# Altium PCB Sampler_4HP.PCBDOC (part 2 of 6)
Units mm, origin at the board's own origin, x right, y up, seen from the top; angles counter-clockwise.
Board outline 159.99 x 100 mm, 4 copper layers (Top, GP1(GND), L3, Bot), stack 1.648 mm thick; 546 components, 321 nets, 1657 pads, 795 vias.
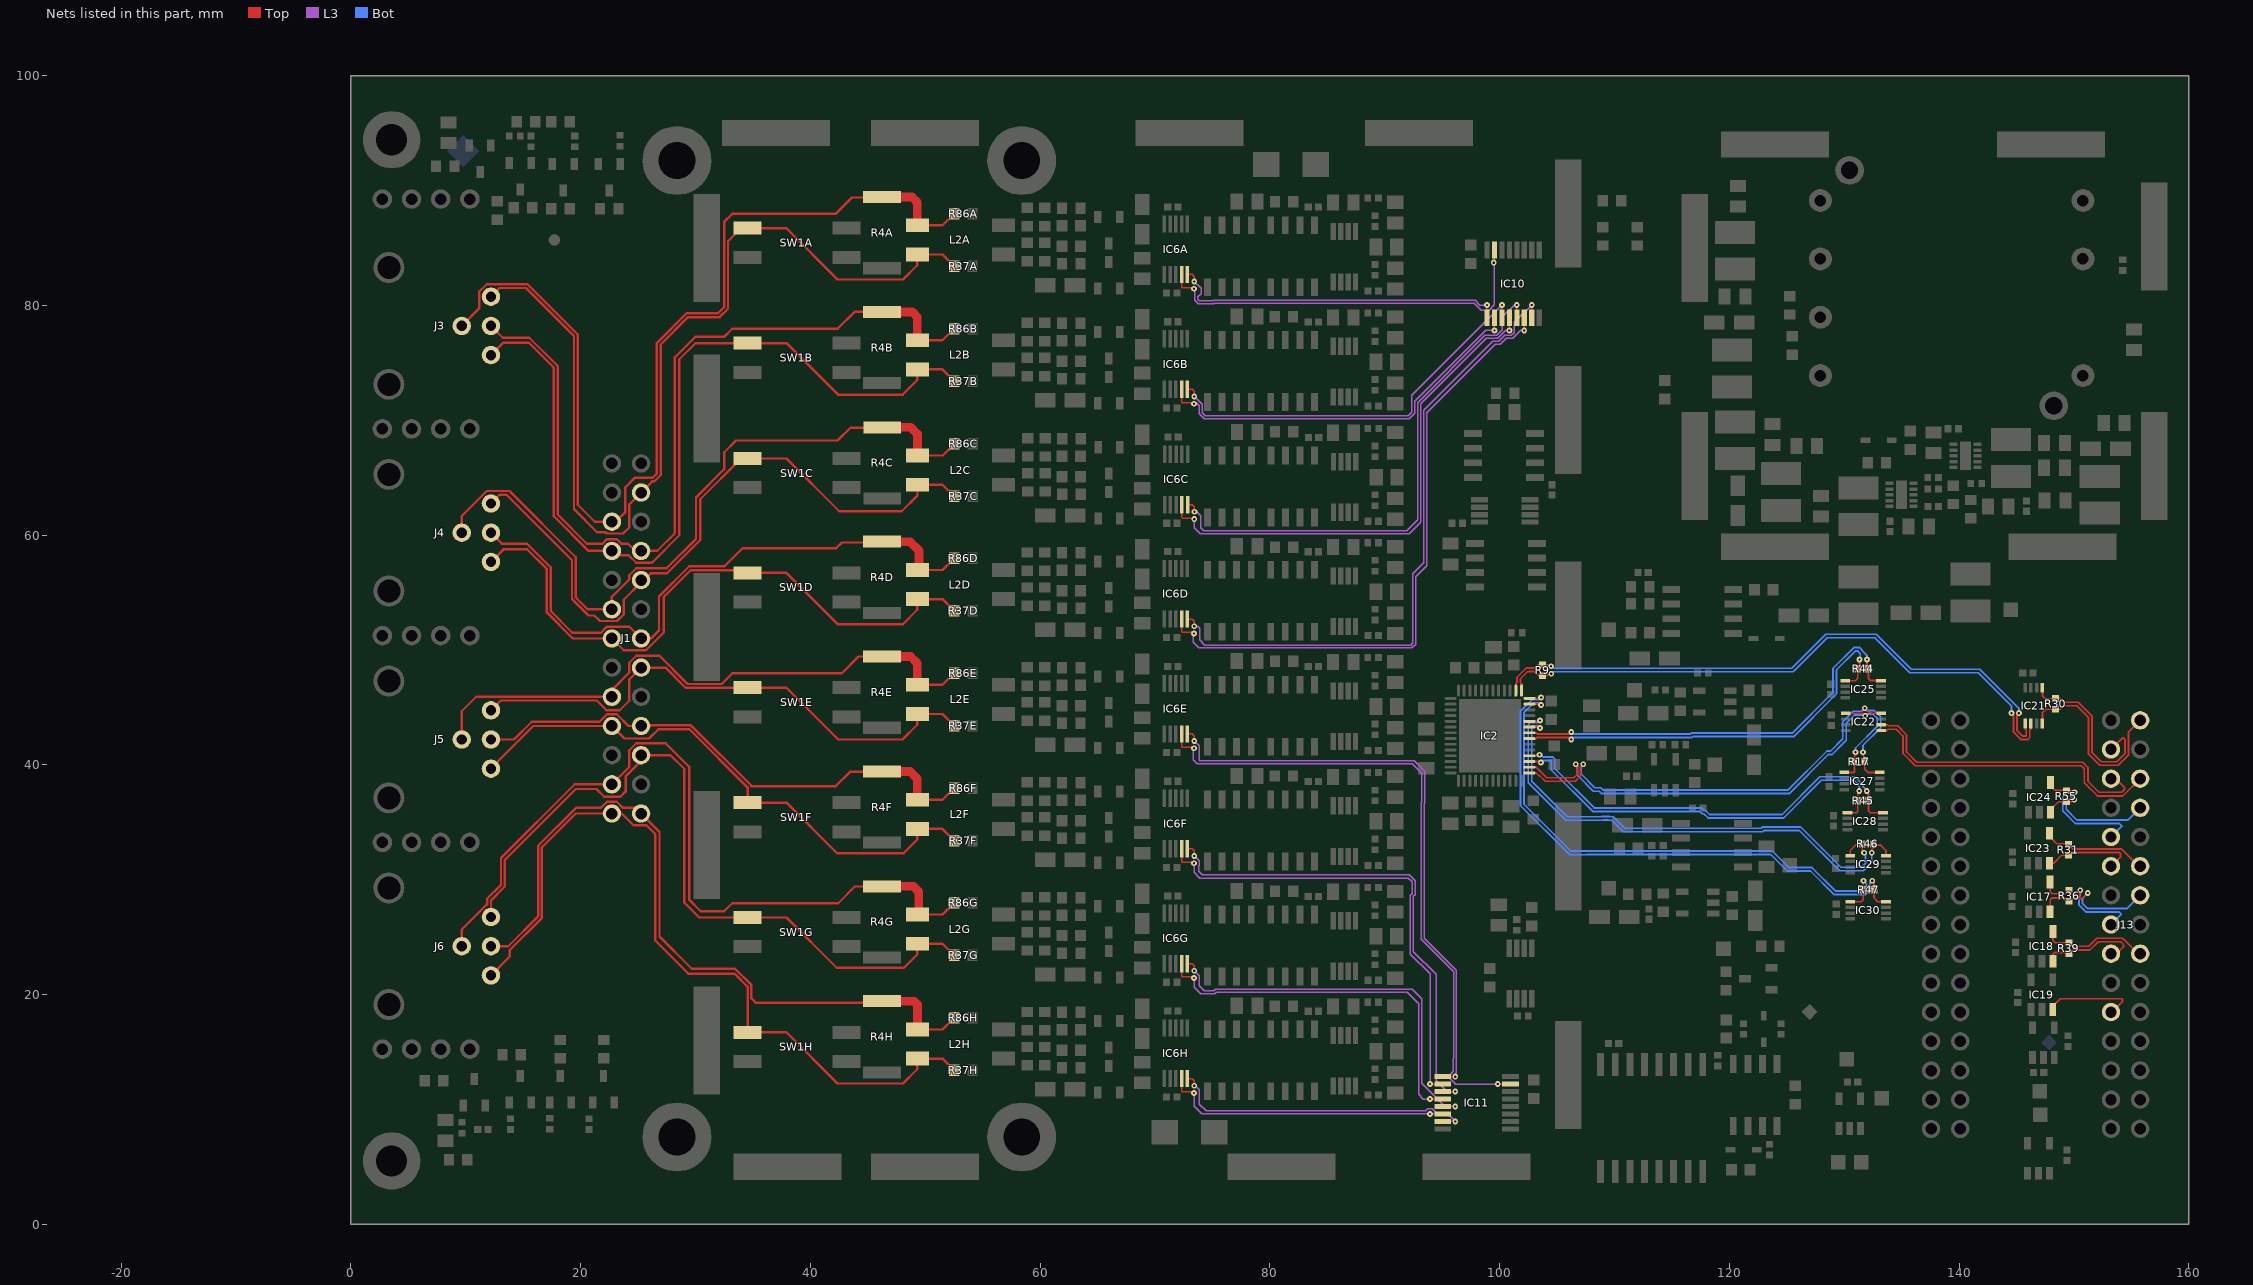
[diagram p4: the nets of this part, all layers, seen from the top]

## Footprints (in the part's own frame and the unit in brackets; to place one, negate y for a bottom-side part, rotate by r counter-clockwise, add the part's x,y. Pads: shape width x height; smd on the part's side, far side on the other; paste and mask are expansions set on the pad) (continued)
IND_MURATA-PS_8400 [mm] "Miniature Surface Mount Power Inductors, 4.5mm L X 3.3mm W X 2.9mm H, MURATA 8400 Series"
  rect 2x3.5 smd: 1(-1.6,0) 2(1.6,0)
  silkscreen extent -0.3,-1.8 0.3,1.8, body extent -2.4,-1.8 2.4,1.8, height 2.9
IND_WURTH_WE-SL2 [mm] "Common Mode SMD Line Filter WE-SL2"
  rect 2x1.2 smd: 1(-3.75,1.27) 2(-3.75,-1.27) 3(3.75,-1.27) 4(3.75,1.27)
  silkscreen extent -4.75,-3.15 4.75,3.15, body extent -4.75,-3.15 4.75,3.15, height 5.3
LED_DIALIGHT_571-0122F [mm] "2x 2mm LED (Top: Green, Bot: Green) PCB Edge Mounting (Without positioning pins) DIALIGHT 571 Serie"
  round 1.7 hole 1: 1(0,0) 2(2.54,0) 3(5.08,0) 4(7.62,0)
  silkscreen extent -6.55,-1.24 8.89,1.24, body extent -6.55,-1.24 8.89,1.24, height 8.61
MTG270_500 [mm] "Plated Through Hole: Hole Dia.=2.7mm Pad Dia.=5.0mm"
  round 5 hole 2.7: 1(0,0)
QFN50P700X800X80_HS-53M [mm] "QFN, 52-Leads, Body 7.00x8.00mm, Pitch 0.50mm, Thermal Pad 5.41x6.40mm, IPC Low Density"
  oval 1.05x0.25 smd: 1(-3.425,3.25) 2(-3.425,2.75) 3(-3.425,2.25) 4(-3.425,1.75) 5(-3.425,1.25) 6(-3.425,0.75) 7(-3.425,0.25) 8(-3.425,-0.25) 9(-3.425,-0.75) 10(-3.425,-1.25) 11(-3.425,-1.75) 12(-3.425,-2.25) 13(-3.425,-2.75) 14(-3.425,-3.25) 27(3.425,-3.25) 28(3.425,-2.75) 29(3.425,-2.25) 30(3.425,-1.75) 31(3.425,-1.25) 32(3.425,-0.75) 33(3.425,-0.25) 34(3.425,0.25) 35(3.425,0.75) 36(3.425,1.25) 37(3.425,1.75) 38(3.425,2.25) 39(3.425,2.75) 40(3.425,3.25)
  oval 0.25x1.05 smd: 15(-2.75,-3.925) 16(-2.25,-3.925) 17(-1.75,-3.925) 18(-1.25,-3.925) 19(-0.75,-3.925) 20(-0.25,-3.925) 21(0.25,-3.925) 22(0.75,-3.925) 23(1.25,-3.925) 24(1.75,-3.925) 25(2.25,-3.925) 26(2.75,-3.925) 41(2.75,3.925) 42(2.25,3.925) 43(1.75,3.925) 44(1.25,3.925) 45(0.75,3.925) 46(0.25,3.925) 47(-0.25,3.925) 48(-0.75,3.925) 49(-1.25,3.925) 50(-1.75,3.925) 51(-2.25,3.925) 52(-2.75,3.925)
  rect 5.41x6.4 smd: 53(0,0)
  silkscreen extent -4.47,-4.2 3.7,4.2, body extent -3.55,-4.05 3.55,4.05, height 0.8
RENHOTEC_RHT-610-0049 [mm] "Dual Right Angle 50 Ohm BNC Jack, White Valox Case"
  round 1.6 hole 0.9: 1(-6.2,-2.54) 2(-6.2,0) 3(-6.2,2.54) 4(-3.66,0)
  round 2.7 hole 2: 6(2.69,-5.08) 7(2.69,5.08)
  silkscreen extent -9.85,-7.5 29.25,7.5, body extent -9.85,-7.5 29.25,7.5, height 29.3
RESC1005X40N [mm] "Chip Resistor, EIA 0402, Metric 1005, Body 1.0x0.5mm, IPC Medium Density"
  rect 0.58x0.62 smd: 1(-0.47,0) 2(0.47,0)
  body extent -0.52,-0.27 0.53,0.28, height 0.4
RESC1608X55N [mm] "Chip Resistor, EIA 0603, Metric 1608, Body 1.6x0.8mm, IPC Medium Density"
  rect 0.9x1 smd: 1(-0.8,0) 2(0.8,0)
  body extent -0.87,-0.47 0.88,0.48, height 0.55
RESC6331X70N [mm] "Chip Resistor, EIA 2512, Metric 6331, 2-Leads, Body 6.3x3.1mm, IPC Medium Density"
  rect 1.05x3.3 smd: 1(-3.1,0) 2(3.1,0)
  silkscreen extent -2.2,-1.65 2.2,1.65, body extent -3.25,-1.65 3.25,1.65, height 0.7
SODFL2512X100N [mm] "SODFL Diode; 1.70mm W X 1.25mm L X 1.00mm H body, IPC Medium Density"
  rect 0.84x0.46 smd: 1(-1.14,0) 2(1.14,0)
  silkscreen extent -1.47,-0.65 0.85,0.86, body extent -1.35,-0.65 1.35,0.65, height 1
SOIC127P600X175-8N [mm] "SOIC 8, Pitch 1.27mm - Body 4x5mm, IPC Medium Density"
  rect 1.55x0.6 smd: 1(-2.7,1.905) 2(-2.7,0.635) 3(-2.7,-0.635) 4(-2.7,-1.905) 5(2.7,-1.905) 6(2.7,-0.635) 7(2.7,0.635) 8(2.7,1.905)
  silkscreen extent -2.52,-2.5 1.55,2.88, body extent -3.1,-2.5 3.1,2.5, height 1.75
SOIC127P1030X265-16N [mm] "SOIC 16, Pitch 1.27mm - Body 7.5x10.3mm, IPC Medium Density"
  rect 2x0.6 smd: 1(-4.65,4.445) 2(-4.65,3.175) 3(-4.65,1.905) 4(-4.65,0.635) 5(-4.65,-0.635) 6(-4.65,-1.905) 7(-4.65,-3.175) 8(-4.65,-4.445) 9(4.65,-4.445) 10(4.65,-3.175) 11(4.65,-1.905) 12(4.65,-0.635) 13(4.65,0.635) 14(4.65,1.905) 15(4.65,3.175) 16(4.65,4.445)
  silkscreen extent -5.52,-5.15 3.33,5.37, body extent -5.18,-5.25 5.18,5.25, height 1.68
SON50P200X300X80-11N-R94X250 [mm] "SON, 10-Leads, Body 2x3mm, Pitch 0.5mm, Thermal Pad 0.94x2.5mm, IPC Medium Density"
  rect 0.7x0.3 smd: 1(-1.05,1) 2(-1.05,0.5) 3(-1.05,0) 4(-1.05,-0.5) 5(-1.05,-1) 6(1.05,-1) 7(1.05,-0.5) 8(1.05,0) 9(1.05,0.5) 10(1.05,1)
  rect 0.94x2.5 smd: 11(0,0)
  silkscreen extent -1.5,-1.55 1.05,1.6, body extent -1.05,-1.55 1.05,1.55, height 0.8
SOP50P310X90-8N [mm] "SOP, 0.50mm pitch; 8 pin, 2.30mm W X 2.00mm L X 0.90mm H body, PC Medium Density"
  rect 0.85x0.3 smd: 1(-1.55,0.75) 2(-1.55,0.25) 3(-1.55,-0.25) 4(-1.55,-0.75) 5(1.55,-0.75) 6(1.55,-0.25) 7(1.55,0.25) 8(1.55,0.75)
  silkscreen extent -1.82,-1 0.8,1.53, body extent -1.62,-1 1.62,1, height 0.9
SOP50P490X110-10N [mm] "MSOP, 10-Leads, Body 3.1x3.1mm (max), Pitch 0.50mm, IPC Medium Density"
  rect 1.5x0.3 smd: 1(-2.2,1) 2(-2.2,0.5) 3(-2.2,0) 4(-2.2,-0.5) 5(-2.2,-1) 6(2.2,-1) 7(2.2,-0.5) 8(2.2,0) 9(2.2,0.5) 10(2.2,1)
  silkscreen extent -2.82,-1.5 1.13,1.77, body extent -2.45,-1.55 2.45,1.55, height 1.1
SOP65P490X110-8N [mm] "SOP, 0.65mm pitch; 8 pin, 3.00mm W X 3.00mm L X 1.10mm H body, IPC Medium Density"
  rect 1.5x0.45 smd: 1(-2.2,0.975) 2(-2.2,0.325) 3(-2.2,-0.325) 4(-2.2,-0.975) 5(2.2,-0.975) 6(2.2,-0.325) 7(2.2,0.325) 8(2.2,0.975)
  silkscreen extent -2.82,-1.5 1.12,1.82, body extent -2.45,-1.55 2.45,1.55, height 1.1
SOP65P640X120-16N [mm] "SOP, 0.65mm pitch; 16 pin, 4.40mm W X 5.00mm L X 1.20mm H body IPC Medium Density"
  rect 1.45x0.45 smd: 1(-2.95,2.275) 2(-2.95,1.625) 3(-2.95,0.975) 4(-2.95,0.325) 5(-2.95,-0.325) 6(-2.95,-0.975) 7(-2.95,-1.625) 8(-2.95,-2.275) 9(2.95,-2.275) 10(2.95,-1.625) 11(2.95,-0.975) 12(2.95,-0.325) 13(2.95,0.325) 14(2.95,0.975) 15(2.95,1.625) 16(2.95,2.275)
  silkscreen extent -3.07,-2.55 1.85,3.17, body extent -3.12,-2.55 3.12,2.55, height 1.2
SOT95P240X110-3N [mm] "SOT23 3-Leads, Pitch 0.95mm, Body 1.3x2.9mm, IPC Medium Density"
  rect 1.05x0.65 smd: 1(-1.15,0.95) 2(-1.15,-0.95) 3(1.15,0)
  silkscreen extent -1.52,-1.45 0.3,1.92, body extent -1.25,-1.5 1.25,1.5, height 1.1
SOT95P280X100-5N [mm] "SOT23, 0.95mm pitch; 5 pin, 1.625mm W X 2.9mm L, IPC Medium Density"
  rect 1.1x0.55 smd: 1(-1.35,0.95) 2(-1.35,0) 3(-1.35,-0.95) 4(1.35,-0.95) 5(1.35,0.95)
  silkscreen extent -1.78,-1.45 0.48,1.87, body extent -1.4,-1.5 1.4,1.5, height 1
SOT95P280X145-5N [mm] "SOT, 0.95mm pitch; 5 pin, 1.60mm W X 2.90mm L X 1.45mm H body, IPC Medium Density"
  rect 1.1x0.6 smd: 1(-1.3,0.95) 2(-1.3,0) 3(-1.3,-0.95) 4(1.3,-0.95) 5(1.3,0.95)
  silkscreen extent -1.72,-1.45 0.43,1.87, body extent -1.4,-1.5 1.4,1.5, height 1.45
SW_CTS_204-121ST [mm] "Body 7.26 x 9.78mm SPST DIP Switch, 204 Series"
  rect 1.13x2.44 smd: 1(-1.27,-4.3) 2(1.27,-4.3) 3(1.27,4.3) 4(-1.27,4.3)
  silkscreen extent -3.63,-4.89 3.63,4.89, body extent -3.63,-5.2 3.63,5.2, height 10.36
TPS127 [mm] "1.27 x  1.27mm SMD Test Point Area"
  rect 1.27x1.27 smd paste-1.27: 1(0,0)
  silkscreen extent -0.94,-0.94 0.94,0.94

## Part data
B1 B2: library part PLATED_HOLE2.7_PAD5.0, "Single Terminal Socket", Author="CERN DEM JMW", ComponentHeight=0mm, Component Type="Standard (No BOM)", CreateDate=27.09.2011, Family="Plated Hole", HelpURL=Undefined, LatestRevisionDate=27.09.2011, Mounted=No, PackageDescription="Plated Through Hole: Hole Dia.=2.7mm Pad Dia.=5.0mm", Part Description="Plated Through Hole: Hole Dia.=2.7mm Pad Dia.=5.0mm", Part Number=PLATED_HOLE2.7_PAD5.0, Pin Count=1, Sense=No, SMD=No, Socket=No, Status=None
C1 C29 C44 C66 C68 C69 C112 C117: library part CC0603_1UF_25V_10%_X7R, "Non-polarised capacitor", Case=0603, Manufacturer=GENERIC, Manufacturer1 ComponentHeight=0.9mm, Manufacturer1 Example=MURATA, Manufacturer1 Part Number=GRM188R71E105KA12D, Tolerance=±10%, Voltage=25V, Author="CERN DEM JLC", Component Type=Standard, CreateDate=18.01.2011, HelpURL=\\cern.ch\dfs\Applications\Altium\Datasheets\CC0603_X7R_MURATA.pdf, LatestRevisionDate=18.01.2011, Manufacturer Part Number=CC0603_1UF_25V_10%_X7R, Mounted=Yes, Part Description="SMD Multilayer Chip Ceramic Capacitor", Part Number=CC0603_1UF_25V_10%_X7R, Pin Count=2, Sense=No, SMD=Yes, Socket=No, Status=None, TC=X7R
C2: library part CC0603_2.2UF_16V_10%_X5R, "Non-polarised capacitor", Case=0603, Manufacturer=GENERIC, Manufacturer1 ComponentHeight=0.9mm, Manufacturer1 Example=YAGEO, Manufacturer1 Part Number=CC0603KRX5R7BB225, Tolerance=±10%, Voltage=16V, Author="CERN DEM JLC", Component Type=Standard, CreateDate=28.04.2011, HelpURL=\\cern.ch\dfs\Applications\Altium\Datasheets\CC0805_X5R_PHYCOMP_HC.pdf, LatestRevisionDate=28.04.2011, Manufacturer Part Number=CC0603_2.2UF_16V_10%_X5R, Mounted=Yes, Part Description="SMD Multilayer Chip Ceramic Capacitor", Part Number=CC0603_2.2UF_16V_10%_X5R, Pin Count=2, Sense=No, SMD=Yes, Socket=No, Status=Preferred, TC=X5R
C3 C4 C5 C7 C8 C54 C57 C94: library part CC0603_100NF_50V_10%_X7R, "Non-polarised capacitor", Case=0603, Manufacturer=GENERIC, Manufacturer1 ComponentHeight=0.87mm, Manufacturer1 Example=PHYCOMP, Manufacturer1 Part Number=223858615649, Tolerance=±10%, Voltage=50V, Author="CERN DEM JLC", Component Type=Standard, CreateDate=03.12.2007, HelpURL=\\cern.ch\dfs\Applications\Altium\Datasheets\CC0603_X7R_PHYCOMP.pdf, LatestRevisionDate=03.12.2007, Manufacturer Part Number=CC0603_100NF_50V_10%_X7R, Mounted=Yes, Part Description="SMD Multilayer Chip Ceramic Capacitor", Part Number=CC0603_100NF_50V_10%_X7R, Pin Count=2, Sense=No, SMD=Yes, Socket=No, Status=Preferred, TC=X7R
C6 C9 C12 C13 C14 C15 C16: library part CC0805_10UF_25V_10%_X5R, "Non-polarised capacitor", Case=0805, Manufacturer=GENERIC, Manufacturer1 ComponentHeight=0.95mm, Manufacturer1 Example=MURATA, Manufacturer1 Part Number=GRM219R61E106KA12D, Tolerance=±10%, Voltage=25V, Author="CERN DEM JLC", Component Type=Standard, CreateDate=25.10.2012, HelpURL=\\cern.ch\dfs\Applications\Altium\Datasheets\CC0805_X5R_MURATA_GRM.pdf, LatestRevisionDate=06.09.2016, Manufacturer Part Number=CC0805_10UF_25V_10%_X5R, Mounted=Yes, Part Description="SMD Multilayer Chip Ceramic Capacitor", Part Number=CC0805_10UF_25V_10%_X5R, Pin Count=2, Sense=No, SMD=Yes, Socket=No, Status=Preferred, TC=X5R
C10A C10B C10C C10D C10E C10F C10G C10H C11A C11B C11C C11D C11E C11F C11G C11H C18 C19 C28 C49 C50 C51 C52 C56 C60 C77 C115 C118: library part CTE3216-18_10UF_16V_20%_AVX_TCJ, "Polarised capacitor", Case=A, Manufacturer=AVX, Manufacturer Part Number=TCJA106M016R0200, Tolerance=±20%, Voltage=16V, Author="CERN DEM JLC", ComponentHeight=1.8mm, Component Type=Standard, CreateDate=29.03.2012, HelpURL=\\cern.ch\dfs\Applications\Altium\Datasheets\CTE_AVX_TCJ.pdf, LatestRevisionDate=29.03.2012, Mounted=Yes, Part Description="ESR 0R200 Tantalum Solid Electrolytic Chip Capacitor with Conductive Polymer Electrode", Part Number=CTE3216-18_10UF_16V_20%_AVX_TCJ, Pin Count=2, Sense=No, SMD=Yes, Socket=No, Status=Preferred
C17A C17B C17C C17D C17E C17F C17G C17H C23A C23B C23C C23D C23E C23F C23G C23H C25A C25B C25C C25D C25E C25F C25G C25H: library part CC0805_2.2NF_25V_1%_C0G, "Non-polarised capacitor", Case=0805, Manufacturer=GENERIC, Manufacturer1 ComponentHeight=0.88mm, Manufacturer1 Example=KEMET, Manufacturer1 Part Number=C0805C222F3GACTU, Tolerance=±1%, Voltage=25V, Author="CERN DEM JLC", Component Type=Standard, CreateDate=11.03.2015, HelpURL="\\cern.ch\dfs\Applications\Altium\Datasheets\CC0805_C0G_KEMET_(Commercial Grade).pdf", LatestRevisionDate=11.03.2015, Manufacturer Part Number=CC0805_2.2NF_25V_1%_C0G, Mounted=Yes, Part Description="SMD Multilayer Chip Ceramic Capacitor", Part Number=CC0805_2.2NF_25V_1%_C0G, Pin Count=2, Sense=No, SMD=Yes, Socket=No, Status=None, TC=C0G/NP0
C20 C21 C22 C24 C30 C31 C33 C37 C38 C43 C45 C46 C55 C58 C62 C63 C67 C120 C122 C153 C154 C156 C157 C158 C159 C160 C161 C162: library part CC0402_100NF_16V_10%_X5R, "Non-polarised capacitor", Case=0402, Manufacturer=GENERIC, Manufacturer1 ComponentHeight=0.55mm, Manufacturer1 Example=MURATA, Manufacturer1 Part Number=GRM155R61C104KA88D, Tolerance=±10%, Voltage=16V, Author="CERN DEM JLC", Component Type=Standard, CreateDate=10.12.2013, HelpURL=\\cern.ch\dfs\Applications\Altium\Datasheets\CC0402_X5R_MURATA_GRM.pdf, LatestRevisionDate=10.12.2013, Manufacturer Part Number=CC0402_100NF_16V_10%_X5R, Mounted=Yes, Part Description="SMD Multilayer Chip Ceramic Capacitor", Part Number=CC0402_100NF_16V_10%_X5R, Pin Count=2, Sense=No, SMD=Yes, Socket=No, Status=None, TC=X5R
C26 C27 C32 C34 C36 C39 C40 C42 C48 C53 C59 C61 C64 C121 C123: library part CC0805_22UF_16V_10%_X5R, "Non-polarised capacitor", Case=0805, Manufacturer=GENERIC, Manufacturer1 ComponentHeight=1.35mm, Manufacturer1 Example=TDK, Manufacturer1 Part Number=C2012X5R1C226KT, Tolerance=±10%, Voltage=16V, Author="CERN DEM JLC", Component Type=Standard, CreateDate=25.10.2012, HelpURL=\\cern.ch\dfs\Applications\Altium\Datasheets\CC0805_X5R_TDK_C.pdf, LatestRevisionDate=25.10.2012, Manufacturer Part Number=CC0805_22UF_16V_10%_X5R, Mounted=Yes, Part Description="SMD Multilayer Chip Ceramic Capacitor", Part Number=CC0805_22UF_16V_10%_X5R, Pin Count=2, Sense=No, SMD=Yes, Socket=No, Status=Preferred, TC=X5R
C35A C35B C35C C35D C35E C35F C35G C35H C41A C41B C41C C41D C41E C41F C41G C41H C70A C70B C70C C70D C70E C70F C70G C70H C71A C71B C71C C71D C71E C71F C71G C71H: library part CC0402_100NF_16V_10%_X7R, "Non-polarised capacitor", Case=0402, Manufacturer=GENERIC, Manufacturer1 ComponentHeight=0.55mm, Manufacturer1 Example=MURATA, Manufacturer1 Part Number=GRM155R71C104KA88D, Tolerance=±10%, Voltage=16V, Author="CERN DEM JLC", Component Type=Standard, CreateDate=2013-12-05, HelpURL=\\cern.ch\dfs\Applications\Altium\Datasheets\CC0402_X7R_MURATA_GRM.pdf, LatestRevisionDate=2007-12-03, Manufacturer Part Number=CC0402_100NF_16V_10%_X7R, Mounted=Yes, Part Description="SMD Multilayer Chip Ceramic Capacitor", Part Number=CC0402_100NF_16V_10%_X7R, Pin Count=2, Sense=No, SMD=Yes, Socket=No, Status="Not Recommended", TC=X7R
C47 C65 C114 C116: library part CC0603_10NF_50V_10%_X7R, "Non-polarised capacitor", Case=0603, Manufacturer=GENERIC, Manufacturer1 ComponentHeight=0.87mm, Manufacturer1 Example=PHYCOMP, Manufacturer1 Part Number=223858615636, Tolerance=±10%, Voltage=50V, Author="CERN DEM JLC", Component Type=Standard, CreateDate=03.12.2007, HelpURL=\\cern.ch\dfs\Applications\Altium\Datasheets\CC0603_X7R_PHYCOMP.pdf, LatestRevisionDate=03.12.2007, Manufacturer Part Number=CC0603_10NF_50V_10%_X7R, Mounted=Yes, Part Description="SMD Multilayer Chip Ceramic Capacitor", Part Number=CC0603_10NF_50V_10%_X7R, Pin Count=2, Sense=No, SMD=Yes, Socket=No, Status=Preferred, TC=X7R
C72A C72B C72C C72D C72E C72F C72G C72H: library part CC0805_82PF_100V_1%_NP0_AVX_08051A820FAT2A, "Non-polarised capacitor", Case=0805, Manufacturer=AVX, Manufacturer Part Number=08051A820FAT2A, Tolerance=±1%, Voltage=100V, Author="CERN DEM WB", ComponentHeight=0.9mm, Component Type=Standard, CreateDate=26.07.2016, HelpURL=\\cern.ch\dfs\Applications\Altium\Datasheets\CC0805_C0G_AVX.pdf, LatestRevisionDate=26.07.2016, Mounted=Yes, Part Description="SMD Multilayer Chip Ceramic Capacitor", Part Number=CC0805_82PF_100V_1%_NP0_AVX_08051A820FAT2A, Pin Count=2, Sense=No, SMD=Yes, Socket=No, Status="Not Recommended", TC=NP0
C73A C73B C73C C73D C73E C73F C73G C73H C74A C74B C74C C74D C74E C74F C74G C74H C75 C76: library part CC0805_47NF_25V_5%_C0G, "Non-polarised capacitor", Case=0805, Manufacturer=GENERIC, Manufacturer1 ComponentHeight=1.4mm, Manufacturer1 Example=KEMET, Manufacturer1 Part Number=C0805C473J3GACTU, Tolerance=±5%, Voltage=25V, Author="CERN DEM JLC", Component Type=Standard, CreateDate=18.01.2011, HelpURL="\\cern.ch\dfs\Applications\Altium\Datasheets\CC0805_C0G_KEMET_(Commercial Grade).pdf", LatestRevisionDate=18.01.2011, Manufacturer Part Number=CC0805_47NF_25V_5%_C0G, Mounted=Yes, Part Description="SMD Multilayer Chip Ceramic Capacitor", Part Number=CC0805_47NF_25V_5%_C0G, Pin Count=2, Sense=No, SMD=Yes, Socket=No, Status=None, TC=C0G/NP0
C78 C79: library part CC0805_NO-VALUE, "Non-polarised capacitor", Case=0805, Manufacturer1 ComponentHeight=1.35mm, Author="CERN DEM JLC", Component Type=Standard, CreateDate=10.12.2008, HelpURL=Undefined, LatestRevisionDate=11.09.2013, Manufacturer=Undefined, Manufacturer Part Number=CC0805_NO-VALUE, Mounted=No, Part Description="Reserved Footprint For 0805(2012) Chip Ceramic Capacitor", Part Number=CC0805_NO-VALUE, Pin Count=2, Sense=No, SMD=Yes, Socket=No, Status=None
C85A C85B C85C C85D C85E C85F C85G C85H C88A C88B C88C C88D C88E C88F C88G C88H: library part CC0603_18PF_50V_5%_NP0, "Non-polarised capacitor", Case=0603, Manufacturer=GENERIC, Manufacturer1 ComponentHeight=0.87mm, Manufacturer1 Example=PHYCOMP, Manufacturer1 Part Number=223886715189, Tolerance=±5%, Voltage=50V, Author="CERN DEM JLC", Component Type=Standard, CreateDate=03.12.2007, HelpURL=\\cern.ch\dfs\Applications\Altium\Datasheets\CC0603_NP0_PHYCOMP.pdf, LatestRevisionDate=03.12.2007, Manufacturer Part Number=CC0603_18PF_50V_5%_NP0, Mounted=Yes, Part Description="SMD Multilayer Chip Ceramic Capacitor", Part Number=CC0603_18PF_50V_5%_NP0, Pin Count=2, Sense=No, SMD=Yes, Socket=No, Status=Preferred, TC=C0G/NP0
CLIP1 CLIP2 CLIP3 CLIP4 CLIP5 CLIP6 CLIP7 CLIP8 CLIP9 CLIP10 CLIP11 CLIP12 CLIP13 CLIP14 CLIP15 CLIP16 CLIP17 CLIP18 CLIP19 CLIP20 CLIP21 CLIP22 CLIP23 CLIP24 CLIP25 CLIP26: "Surface Mount Clip for PCB Screening Covers", Manufacturer=HARWIN, Author="CERN DEM JLC", ComponentHeight=3.5mm, Component Type=Standard, CreateDate=2013-06-25, HelpURL=\\cern.ch\dfs\Applications\Altium\Datasheets\CLIP_HOLLAND-SHIELDING_LC.pdf, LatestRevisionDate=2013-06-25, Manufacturer Part Number=S1411-46R, Mounted=Yes, PackageDescription="Surface Mount Clip for PCB Screening Covers, 1500 Serie", Part Description="Surface Mount Clip for PCB Screening Covers, 1500 Serie", Part Number=S1411-46R, Pin Count=1, PressFit=No, SMD=Yes, Socket=No, Status=None, Table="Metal Screening Box"
D1A D1B D1C D1D D1E D1F D1G D1H D3A D3B D3C D3D D3E D3F D3G D3H: "Serial Diode", Case=SOT23-3, Manufacturer="NXP SEMICONDUCTORS", Power=250mW, Voltage=75V, Author="CERN DEM JMW", Bonding=No, ComponentHeight=1.1mm, Component Type=Standard, CreateDate=2008-11-21, Device=BAV199, HelpURL=\\cern.ch\dfs\Applications\Altium\Datasheets\BAV199.pdf, LatestRevisionDate=2008-11-21, Manufacturer Part Number=BAV199, Mounted=Yes, PackageDescription="SOT23 3-Leads, Pitch 0.95mm - Body 1.4x3mm, IPC Medium Density", Part Description="Low-Leakage Double Diode", Part Number=BAV199, Pin Count=3, PressFit=No, Sense=No, SMD=Yes, Socket=No
D2 D4 D5 D6: "Diode", Case=SOD-323F, Manufacturer="FAIRCHILD SEMICONDUCTOR", Power=150mA, Voltage=75V, Author="CERN DEM JLC", Bonding=No, ComponentHeight=1mm, Component Type=Standard, CreateDate=12.05.2011, Device=1N4148WS, HelpURL=\\cern.ch\dfs\Applications\Altium\Datasheets\1N4148WS.pdf, LatestRevisionDate=12.05.2011, Manufacturer Part Number=1N4148WS, Mounted=Yes, PackageDescription="SODFL Diode; 1.70mm W X 1.25mm L X 1.00mm H body, IPC Medium Density", Part Description="Small Signal Diodes", Part Number=1N4148WS, Pin Count=2, PressFit=No, Sense=No, SMD=Yes, Socket=No
D8 D9: "Zener Diode", Case=DO-214AA, Manufacturer="FAIRCHILD SEMICONDUCTOR", Power=600W, Voltage=12V, Author="CERN DEM JLC", Bonding=No, ComponentHeight=2.65mm, Component Type=Standard, CreateDate=10.04.2013, Device=SMBJ12A, HelpURL=\\cern.ch\dfs\Applications\Altium\Datasheets\SMBJ.pdf, LatestRevisionDate=10.04.2013, Manufacturer Part Number=SMBJ12A, Mounted=Yes, PackageDescription="DO-214-AA/SMB Diode, Molded Body; 5.34mm L X 3.625mm W X 2.65mm H, IPC Medium Density", Part Description="Uni-Directional Transient Voltage Suppressor Diode", Part Number=SMBJ12A, Pin Count=2, PressFit=No, Sense=No, SMD=Yes, Socket=No
FTG17: library part FIDUCIAL_TARGET_C100-200, "Fiducial Target", Author="CERN DEM JLC", ComponentHeight=0mm, Component Type="Standard (No BOM)", CreateDate=09.02.2010, Family=Fiducial, HelpURL=Undefined, LatestRevisionDate=04.04.2012, Mounted=No, PackageDescription="Round Fiducial Target, Top Layer, 1.0mm, Top Solder 2.0mm, Keepout =2.0mm", Part Description="Round Fiducial Target, Top Layer, 1.0mm, Top Solder 2.0mm, Keepout =2.0mm", Part Number=FIDUCIAL_TARGET_C100-200, Pin Count=1, Sense=No, SMD=Yes, Socket=No, Status=None
FTG18 FTG20: library part FIDUCIAL_TARGET_S100-200, "Fiducial Target", Author="CERN DEM JLC", ComponentHeight=0mm, Component Type="Standard (No BOM)", CreateDate=09.02.2010, Family=Fiducial, HelpURL=Undefined, LatestRevisionDate=04.04.2012, Mounted=No, PackageDescription="Square Fiducial Target, Top Layer, 1.0mm, Top Solder 2.0mm, Keepout =2.0mm", Part Description="Square Fiducial Target, Top Layer, 1.0mm, Top Solder 2.0mm, Keepout =2.0mm", Part Number=FIDUCIAL_TARGET_S100-200, Pin Count=1, Sense=No, SMD=Yes, Socket=No, Status=None
FTG19: library part FIDUCIAL_TARGET_S200-400, "Fiducial Target", Author="CERN DEM JLC", ComponentHeight=0mm, Component Type="Standard (No BOM)", CreateDate=02.06.2008, Family=Fiducial, HelpURL=Undefined, LatestRevisionDate=04.04.2012, Mounted=No, PackageDescription="Square Fiducial Target, Top Layer, 2.0mm, Top Solder 4.0mm, Keepout =4.0mm", Part Description="Square Fiducial Target, Top Layer, 2.0mm, Top Solder 4.0mm, Keepout =4.0mm", Part Number=FIDUCIAL_TARGET_S200-400, Pin Count=1, Sense=No, SMD=Yes, Socket=No, Status=None
IC1: "0.25ppm Noise, Low Drift Precision Buffered Voltage Reference", Case=SSOP8, Manufacturer="LINEAR TECHNOLOGY", Author=GK, Bonding=No, ComponentHeight=1.1mm, Component Type=Standard, CreateDate=07.06.2012, Device=LTC6655BHMS8-4.096#PBF, HelpURL=\\cern.ch\dfs\Applications\Altium\Datasheets\LTC6655BHMS8-5#PBF.pdf, LatestRevisionDate=07.06.2012, Manufacturer Part Number=LTC6655BHMS8-4.096#PBF, Mounted=Yes, PackageDescription="SOP, 8-Leads, Body 3.1x3.1mm (max), Pitch 0.65mm, IPC Medium Density", Part Description="4.096V, 0.25ppm Noise, Low Drift Precision Buffered Voltage Reference", Part Number=LTC6655BHMS8-4.096#PBF, Pin Count=8, PressFit=No, Sense=No, SMD=Yes, Socket=No
IC2: "Octal, 16-Bit, 1.5Msps/Ch  Simultaneous Sampling ADC", Case=QFP48, Manufacturer="LINEAR TECHNOLOGY", Author=GK, Bonding=No, ComponentHeight=0.8, Component Type=Standard, CreateDate=10.01.2017, Device=LTC2320HUKG-16#PBF, HelpURL=\\cern.ch\dfs\Applications\Altium\Datasheets\LTC2335CLX-18#PBF.pdf, LatestRevisionDate=10.01.2017, Manufacturer Part Number=LTC2320HUKG-16#PBF, Mounted=Yes, PackageDescription="QFN, 52-Leads, Body 7.00x8.00mm, Pitch 0.50mm, Thermal Pad 5.41x6.40mm, IPC Low Density", Part Description="Octal, 16-Bit, 1.5Msps/Ch  Simultaneous Sampling ADC", Part Number=LTC2320HUKG-16#PBF, Pin Count=48, PressFit=No, Sense=No, SMD=Yes, Socket=No
IC3: "CONV DC/DC 6W DUAL 12V +-12V PCB", Manufacturer="TDK-Lambda Americas Inc.", Author=GK, Bonding=No, ComponentHeight=10.45mm, Component Type=Standard, CreateDate=17.12.2016, Device=CC6-1212DF-E, LatestRevisionDate=17.12.2016, Manufacturer Part Number=CC6-1212DF-E, Mounted=Yes, PackageDescription="CC6 Series, Body 0.900 x 0.831 x 0.335, Regulated", Part Description="CONV DC/DC 6W DUAL 12V +-12V PCB", Part Number=CC6-1212DF-E, Pin Count=7, PressFit=No, Sense=No, SMD=No, Socket=No
IC4 IC7: "100mA, Low Noise, LDO Micropower Adjustable Regulator in SOT-23", Case=SOT23, Manufacturer="LINEAR TECHNOLOGY", Author="CERN DEM MR", Bonding=No, ComponentHeight=1mm, Component Type=Standard, CreateDate=17.02.2016, Device=LT1761ES5-BYP#TRMPBF, HelpURL=\\cern.ch\dfs\Applications\Altium\Datasheets\LT1761ES5-SD#TRMPBF.pdf, LatestRevisionDate=17.02.2016, Manufacturer Part Number=LT1761ES5-BYP#TRMPBF, Mounted=Yes, PackageDescription="SOT23, 0.95mm pitch; 5 pin, 1.6mm W X 2.9mm L, IPC Medium Density", Part Description="1.22V to 20V, 100mA, Low Noise, LDO Adjustable Micropower Regulator", Part Number=LT1761ES5-BYP#TRMPBF, Pin Count=5, PressFit=No, Sense=No, SMD=Yes, Socket=No
IC5 IC12A IC12B IC12C IC12D IC12E IC12F IC12G IC12H: "36-V, Precision, Rail-to-Rail Input Output, Low Offset Voltage Op Amp 8-VSSOP", Case=MSOP8, Manufacturer="TEXAS INSTRUMENTS", Author=GK, Bonding=No, ComponentHeight=1.1mm, Component Type=Standard, CreateDate=20.04.2017, Device=OPA2197IDGKR, HelpURL=\\cern.ch\dfs\Applications\Altium\Datasheets\OPA2140AIDGK.pdf, LatestRevisionDate=20.04.2017, Manufacturer Part Number=OPA2197IDGKR, Mounted=Yes, PackageDescription="SOP, 0.65mm pitch; 8 pin, 3.00mm W X 3.00mm L X 1.10mm H body, IPC Medium Density", Part Description="High-Precision, Low-Noise, Rail-to-Rail Output,10-MHz Op Amp", Part Number=OPA2197IDGKR, Pin Count=8, PressFit=No, Sense=No, SMD=Yes, Socket=No
IC6A IC6B IC6C IC6D IC6E IC6F IC6G IC6H: "10MHz, 20V/us, G= 1, 10, 100, 1000 iCMOS Programmable Gain Instrumentation Amplifier", Case=MSOP10, Manufacturer="ANALOG DEVICES", Author="CERN DEM JLC", Bonding=No, ComponentHeight=1.1mm, Component Type=Standard, CreateDate=2013-10-02, Device=AD8253ARMZ, HelpURL=\\cern.ch\dfs\Applications\Altium\Datasheets\AD8253ARMZ.pdf, LatestRevisionDate=2013-10-02, Manufacturer Part Number=AD8253ARMZ, Mounted=Yes, PackageDescription="MSOP, 10-Leads, Body 3.1x3.1mm (max), Pitch 0.50mm, IPC Medium Density", Part Description="10MHz, 20V/us, G= 1, 10, 100, 1000 iCMOS Programmable Gain Instrumentation Amplifier", Part Number=AD8253ARMZ, Pin Count=8, PressFit=No, Sense=No, SMD=Yes, Socket=No
IC8 IC26: "4.75-28VDC to 1-6VDC, 500mA Step-Down Converter With Sleep Mode", Case=SON10, Manufacturer="TEXAS INSTRUMENTS", Author="CERN DEM JMW", Bonding=No, ComponentHeight=0.8mm, Component Type=Standard, CreateDate=11.08.2015, Device=TPS62175DQC, HelpURL=\\cern.ch\dfs\Applications\Altium\Datasheets\TPS62175DQC.pdf, LatestRevisionDate=11.08.2015, Manufacturer Part Number=TPS62175DQC, Mounted=Yes, PackageDescription="SON, 10-Leads, Body 2x3mm, Pitch 0.5mm, Thermal Pad 0.94x2.5mm, IPC Medium Density", Part Description="4.75-28VDC to 1-6VDC, 500mA Step-Down Converter With Sleep Mode", Part Number=TPS62175DQC, Pin Count=11, PressFit=No, Sense=No, SMD=Yes, Socket=No
IC9 IC40: "1.7V-5.5V, 2K I2C Serial EEPROM With EUI-48 Node Identity", Case=SOT23-5, Manufacturer="MICROCHIP TECHNOLOGY", Author="CERN DEM MR", Bonding=No, ComponentHeight=1.45mm, Component Type=Standard, CreateDate=31.03.2016, Device=24AA02E48T-I/OT, HelpURL=\\cern.ch\dfs\Applications\Altium\Datasheets\24AA02E48T-I-OT.pdf, LatestRevisionDate=31.03.2016, Manufacturer Part Number=24AA02E48T-I/OT, Mounted=Yes, PackageDescription="SOT, 0.95mm pitch; 5 pin, 1.60mm W X 2.90mm L X 1.45mm H body, IPC Medium Density", Part Description="1.7V-5.5V, 2K I2C Serial EEPROM With EUI-48 Node Identity", Part Number=24AA02E48T-I/OT, Pin Count=5, PressFit=No, Sense=No, SMD=Yes, Socket=No
IC10 IC11: "8-Bit Shift Register With 3-State Output Register", Case=TSSOP16, Manufacturer="TEXAS INSTRUMENTS", Author="CERN DEM JLC", Bonding=No, ComponentHeight=1.2mm, Component Type=Standard, CreateDate=10.05.2012, Device=SN74LV595APWT, HelpURL=\\cern.ch\dfs\Applications\Altium\Datasheets\SN74LV595APWT.pdf, LatestRevisionDate=10.05.2012, Manufacturer Part Number=SN74LV595APWT, Mounted=Yes, PackageDescription="SOP, 0.65mm pitch; 16 pin, 4.40mm W X 5.00mm L X 1.20mm H body IPC Medium Density", Part Description="8-Bit Shift Register With 3-State Output Register", Part Number=SN74LV595APWT, Pin Count=16, PressFit=No, Sense=No, SMD=Yes, Socket=No
IC13 IC16: "1.22V to 20V 500mA, Low Noise, LDO Adjustable Micropower Regulator", Case=SOIC8, Manufacturer="LINEAR TECHNOLOGY", Author="CERN DEM JLC", Bonding=No, ComponentHeight=1.75mm, Component Type=Standard, CreateDate=11.01.2010, Device=LT1763CS8#PBF, HelpURL=\\cern.ch\dfs\Applications\Altium\Datasheets\LT1763CS8#PBF.pdf, LatestRevisionDate=11.01.2010, Manufacturer Part Number=LT1763CS8#PBF, Mounted=Yes, PackageDescription="SOIC 8, Pitch 1.27mm, Body 4x5mm, IPC Medium Density", Part Description="1.22V to 20V 500mA, Low Noise, LDO Adjustable Micropower Regulator", Part Number=LT1763CS8#PBF, Pin Count=8, PressFit=No, Sense=No, SMD=Yes, Socket=No
IC14: "200mA, Low Noise, Low Dropout Negative Micropower Regulator", Case=SOT23-5, Manufacturer="LINEAR TECHNOLOGY", Author="CERN DEM JLC", Bonding=No, ComponentHeight=1mm, Component Type=Standard, CreateDate=05.05.2009, Device=LT1964ES5-SD#TRMPBF, HelpURL=\\cern.ch\dfs\Applications\Altium\Datasheets\LT1964ES5-SD#TRMPBF.pdf, LatestRevisionDate=05.05.2009, Manufacturer Part Number=LT1964ES5-SD#TRMPBF, Mounted=Yes, PackageDescription="SOT23, 0.95mm pitch; 5 pin, 1.75mm W X 3.00mm L, IPC Medium Density", Part Description="-1.22V to -20V, 200mA, Low Noise, Low Dropout Negative Micropower Regulator", Part Number=LT1964ES5-SD#TRMPBF, Pin Count=5, PressFit=No, Sense=No, SMD=Yes, Socket=No
IC15: "Dual Operational Amplifier", Case=SOIC8, Manufacturer="TEXAS INSTRUMENTS", Author="CERN DEM JLC", Bonding=No, ComponentHeight=1.75mm, Component Type=Standard, CreateDate=22.10.2013, Device=LM393AD, HelpURL=\\cern.ch\dfs\Applications\Altium\Datasheets\LM393AD.pdf, LatestRevisionDate=22.10.2013, Manufacturer Part Number=LM393AD, Mounted=Yes, PackageDescription="SOIC 8, Pitch 1.27mm - Body 4x5mm, IPC Medium Density", Part Description="Dual Differential Comparator", Part Number=LM393AD, Pin Count=8, PressFit=No, Sense=No, SMD=Yes, Socket=No
IC17 IC18 IC20 IC23 IC24: "High-Speed Differential Line Receiver", Case=SOT23-5, Manufacturer="TEXAS INSTRUMENTS", Author="CERN DEM JLC", Bonding=No, ComponentHeight=1.45mm, Component Type=Standard, CreateDate=03.03.2011, Device=SN65LVDS2DBVR, HelpURL=\\cern.ch\dfs\Applications\Altium\Datasheets\SN65LVDS2DBVR.pdf, LatestRevisionDate=22.09.2011, Manufacturer Part Number=SN65LVDS2DBVR, Mounted=Yes, PackageDescription="SOT, 0.95mm pitch; 5 pin, 1.60mm W X 2.90mm L X 1.45mm H body, IPC Medium Density", Part Description="High-Speed Differential Line Receiver", Part Number=SN65LVDS2DBVR, Pin Count=5, PressFit=No, Sense=No, SMD=Yes, Socket=No
IC19: "High-Speed Differential Line Driver", Case=SOT23-5, Manufacturer="TEXAS INSTRUMENTS", Author="CERN DEM JLC", Bonding=No, ComponentHeight=1.45mm, Component Type=Standard, CreateDate=22.09.2011, Device=SN65LVDS1DBVT, HelpURL=\\cern.ch\dfs\Applications\Altium\Datasheets\SN65LVDS1DBVT.pdf, LatestRevisionDate=22.09.2011, Manufacturer Part Number=SN65LVDS1DBVT, Mounted=Yes, PackageDescription="SOT, 0.95mm pitch; 5 pin, 1.60mm W X 2.90mm L X 1.45mm H body, IPC Medium Density", Part Description="High-Speed Differential Line Driver", Part Number=SN65LVDS1DBVT, Pin Count=5, PressFit=No, Sense=No, SMD=Yes, Socket=No
IC21 IC22 IC25 IC27 IC28 IC29 IC30: "LVDS Single Port High Speed Repeater", Case=TSSOP8, Manufacturer="FAIRCHILD SEMICONDUCTOR", Author="CERN DEM JLC", Bonding=No, ComponentHeight=0.8mm, Component Type=Standard, CreateDate=08.11.2016, Device=FIN1101K8X, HelpURL=\\cern.ch\dfs\Applications\Altium\Datasheets\FIN1101K8X.pdf, LatestRevisionDate=08.11.2016, Manufacturer Part Number=FIN1101K8X, Mounted=Yes, PackageDescription="SOP, 0.50mm Pitch; 8 pin, 2.30mm W X 2.00mm L X 0.90mm H body, PC Medium Density", Part Description="LVDS Single Port High Speed Repeater", Part Number=FIN1101K8X, Pin Count=8, PressFit=No, Sense=No, SMD=Yes, Socket=No
IC38: "Remote 8-bit I/O Expander For I2C Bus", Case=SOIC16W, Manufacturer="TEXAS INSTRUMENTS", Author="CERN DEM JLC", Bonding=No, ComponentHeight=2.65mm, Component Type=Standard, CreateDate=01.11.2012, Device=PCF8574ADW, HelpURL=\\cern.ch\dfs\Applications\Altium\Datasheets\PCF8574ADW.pdf, LatestRevisionDate=01.11.2012, Manufacturer Part Number=PCF8574ADW, Mounted=Yes, PackageDescription="SOIC 16, Pitch 1.27mm - Body 7.5x10.3mm, IPC Medium Density", Part Description="Remote 8-bit I/O Expander For I2C Bus", Part Number=PCF8574ADW, Pin Count=16, PressFit=No, Sense=No, SMD=Yes, Socket=No
J1: library part 3M_N2526-6002RB, "Connector 26 Male", Manufacturer=3M, Manufacturer Part Number=N2526-6002RB, Author="CERN DEM JLC", ComponentHeight=10.03mm, Component Type=Standard, CreateDate=11.02.2009, Family="Header 26", HelpURL=\\cern.ch\dfs\Applications\Altium\Datasheets\3M_N2526-6002RB.pdf, LatestRevisionDate=11.08.2009, Mounted=Yes, Part Description="26 Contacts - Straight .100'' x .100'' Low Profile Four-Wall Header, 2500 Series", Part Number=3M_N2526-6002RB, Pin Count=26, PressFit=No, Sense=No, SMD=No, Socket=No, Status=None
J2 J13: library part 3M_N2530-6002RB, "Connector 30 Male", Manufacturer=3M, Manufacturer Part Number=N2530-6002RB, Author="CERN DEM JLC", ComponentHeight=10.03mm, Component Type=Standard, CreateDate=11.02.2009, Family="Header 30", HelpURL=\\cern.ch\dfs\Applications\Altium\Datasheets\3M_N2530-6002RB.pdf, LatestRevisionDate=11.08.2009, Mounted=Yes, Part Description="30 Contacts - Straight .100'' x .100'' Low Profile Four-Wall Header, 2500 Series", Part Number=3M_N2530-6002RB, Pin Count=30, PressFit=No, Sense=No, SMD=No, Socket=No, Status=None
J3 J4 J5 J6: "Dual Right Angle 50 Ohm BNC Jack, White Valox Case", Manufacturer=RENHOTEC, Manufacturer Part Number=RHT-610-0049, Part Number=RENHOTEC_RHT-610-0049, Author=GK, ComponentHeight=29.3mm, Component Type=Standard, CreateDate=09.04.2013, Family=BNC, HelpURL=\\cern.ch\dfs\Applications\Altium\Datasheets\BOMAR_364A2595.pdf, LatestRevisionDate=09.04.2013, Mounted=Yes, Part Description="Dual Right Angle 50 Ohm BNC Jack, White Valox Case", Pin Count=6, PressFit=No, Sense=No, SMD=No, Socket=No, Status=None
L1 L3 L4 L5 L6 L10 L11 L12 L13: library part IND_10UH_10%_MURATA-PS_8400, "Inductor With Core", Manufacturer="MURATA POWER SOLUTIONS", Manufacturer Part Number=84103C, Power=950mA, Resistance=0.24R, Tolerance=±10%, Author="CERN DEM JLC", ComponentHeight=2.9mm, Component Type=Standard, CreateDate=02.07.2012, HelpURL=\\cern.ch\dfs\Applications\Altium\Datasheets\IND_MURATA-PS_8400.pdf, LatestRevisionDate=02.07.2012, Mounted=Yes, Part Description="Miniature Surface Mount Power Inductor (8400 Serie)", Part Number=IND_10UH_10%_MURATA-PS_8400, Pin Count=2, Sense=No, SMD=Yes, Socket=No, Status=None
L2A L2B L2C L2D L2E L2F L2G L2H: library part IND_6.5MH_50%_WURTH_WE-SL2-744229, "Inductor Common Mode", Manufacturer="WURTH ELEKTRONIK", Manufacturer Part Number=744229, Power=400mA, Resistance=0.95R, Tolerance=±50%, Author="CERN DEM JLC", ComponentHeight=5.3mm, Component Type=Standard, CreateDate=01.10.2012, HelpURL=\\cern.ch\dfs\Applications\Altium\Datasheets\IND_WURTH_WE-SL2_744229.pdf, LatestRevisionDate=15.10.2012, Mounted=Yes, Part Description="Common Mode SMD Line Filter (WE-SL2 Serie)", Part Number=IND_6.5MH_50%_WURTH_WE-SL2-744229, Pin Count=4, Sense=No, SMD=Yes, Socket=No, Status=None
LD1 LD2 LD3 LD4 LD5: library part LED_DIALIGHT_571-0122F, "LED x2 Green 1C2A-BOT_3C4A-TOP", Manufacturer=DIALIGHT, Manufacturer Part Number=571-0122F, Author="CERN DEM JLC", Bonding=No, Color=Green/Green, ComponentHeight=8.6mm, Component Type=Standard, CreateDate=09.11.2009, HelpURL=\\cern.ch\dfs\Applications\Altium\Datasheets\LED_DIALIGHT_571-0122F.pdf, LatestRevisionDate=17.03.2010, Mounted=Yes, PackageDescription="2x 2mm Red LED PCB Edge Mounting (Without positioning pins) DIALIGHT 571 Serie", Part Description="Dual 2mm Green LEDs CBI® Circuit Board Indicator (Without positioning pins)", Part Number=LED_DIALIGHT_571-0122F, Pin Count=4, PressFit=No, Sense=No, SMD=No, Socket=No
R1 R8 R10 R15: library part R0402_0R_JUMPER, "Resistor", Case=0402, Manufacturer=GENERIC, Manufacturer1 ComponentHeight=0.4mm, Manufacturer1 Example="YAGEO PHYCOMP", Manufacturer1 Part Number=232270591001L, Author="CERN DEM JLC", Component Type=Standard, CreateDate=03.12.2007, HelpURL=\\cern.ch\dfs\Applications\Altium\Datasheets\R0402_Phycomp_RC0402.pdf, LatestRevisionDate=17.10.2012, Manufacturer Part Number=R0402_0R_JUMPER, Mounted=Yes, Part Description="1A (0.05R Max DC Resistance) Zero Ohm Jumper", Part Number=R0402_0R_JUMPER, Pin Count=2, Sense=No, SMD=Yes, Socket=No, Status="Not recommended"
R2: library part R0603_1K_1%_0.1W_100PPM, "Resistor - 1%", Case=0603, Manufacturer=GENERIC, Manufacturer1 ComponentHeight=0.55mm, Manufacturer1 Example="NIC COMPONENT", Manufacturer1 Part Number=NRC06F1001TRF, Power=0.1W, Tolerance=±1%, Author="CERN DEM JLC", Component Type=Standard, CreateDate=03.12.2007, HelpURL=\\cern.ch\dfs\Applications\Altium\Datasheets\R0603_NIC_NRC.pdf, LatestRevisionDate=13.03.2008, Manufacturer Part Number=R0603_1K_1%_0.1W_100PPM, Mounted=Yes, Part Description="General Purpose Thick Film Chip Resistor", Part Number=R0603_1K_1%_0.1W_100PPM, Pin Count=2, Sense=No, SMD=Yes, Socket=No, Status=Preferred, TC=±100ppm/°C
R3 R6 R7 R37A R37B R37C R37D R37E R37F R37G R37H R74 R86A R86B R86C R86D R86E R86F R86G R86H: library part R0603_NO-VALUE, "Resistor", Case=0603, Author="CERN DEM JLC", Component Type=Standard, CreateDate=03.12.2007, HelpURL=Undefined, LatestRevisionDate=13.03.2008, Manufacturer=Undefined, Manufacturer1 ComponentHeight=Undefined, Manufacturer1 Example=Undefined, Manufacturer1 Part Number=Undefined, Manufacturer Part Number=R0603_NO-VALUE, Mounted=No, Part Description="Reserved Footprint For a 0603 (1608) Chip Resistor", Part Number=R0603_NO-VALUE, Pin Count=2, Sense=No, SMD=Yes, Socket=No, Status=None
R4A R4B R4C R4D R4E R4F R4G R4H: library part R2512_49R9_1%_1W_100PPM_VISHAY_CRCW, "Resistor - 1%", Case=2512, Manufacturer="VISHAY DRALORIC", Manufacturer Part Number=CRCW251249R9FKEG, Power=1W, Tolerance=±1%, Author="CERN DEM JLC", ComponentHeight=0.7mm, Component Type=Standard, CreateDate=22.05.2012, HelpURL=\\cern.ch\dfs\Applications\Altium\Datasheets\R2512_VISHAY_CRCW2512.pdf, LatestRevisionDate=22.05.2012, Mounted=Yes, Part Description="Thick Film Chip Resistor", Part Number=R2512_49R9_1%_1W_100PPM_VISHAY_CRCW, Pin Count=2, PressFit=No, Sense=No, SMD=Yes, Socket=No, Status=None, TC=±100ppm/°C
R5 R12 R13 R22 R49 R68 R69 R70 R71: library part R0402_10K_1%_0.0625W_100PPM, "Resistor - 1%", Case=0402, Manufacturer=GENERIC, Manufacturer1 ComponentHeight=0.4mm, Manufacturer1 Example="YAGEO PHYCOMP", Manufacturer1 Part Number=232270671003L, Power=0.0625W, Tolerance=±1%, Author="CERN DEM JLC", Component Type=Standard, CreateDate=03.12.2007, HelpURL=\\cern.ch\dfs\Applications\Altium\Datasheets\R0402_Phycomp_RC0402.pdf, LatestRevisionDate=17.10.2012, Manufacturer Part Number=R0402_10K_1%_0.0625W_100PPM, Mounted=Yes, Part Description="General Purpose Thick Film Chip Resistor", Part Number=R0402_10K_1%_0.0625W_100PPM, Pin Count=2, Sense=No, SMD=Yes, Socket=No, TC=±100ppm/°C
  R5 R12 R13 R49 R68 R69 R70 R71: Status="Not recommended"
  R22: PressFit=No, Status="Not Recommended"
R9 R17 R30 R31 R36 R39 R40 R44 R45 R46 R47 R55: library part R0402_100R_1%_0.1W_100PPM, "Resistor - 1%", Case=0402, Manufacturer=GENERIC, Manufacturer1 ComponentHeight=0.4mm, Manufacturer1 Example=PANASONIC, Manufacturer1 Part Number=ERJ2RKF1000X, Manufacturer Part Number=R0402_100R_1%_0.1W_100PPM_50V, Power=0.1W, Tolerance=±1%, Voltage=50V, Author="CERN DEM JLC", Component Type=Standard, CreateDate=12.12.2013, HelpURL=\\cern.ch\dfs\Applications\Altium\Datasheets\R0402_PANASONIC_ERJ2RK.pdf, LatestRevisionDate=03.03.2015, Mounted=Yes, Part Description="General Purpose Thick Film Chip Resistor", Part Number=R0402_100R_1%_0.1W_100PPM, Pin Count=2, Sense=No, SMD=Yes, Socket=No, Status="Not recommended", TC=±100ppm/°C
R11 R21: library part R0603_82K_1%_0.1W_100PPM, "Resistor - 1%", Case=0603, Manufacturer=GENERIC, Manufacturer1 ComponentHeight=0.55mm, Manufacturer1 Example="NIC COMPONENT", Manufacturer1 Part Number=NRC06F8202TRF, Power=0.1W, Tolerance=±1%, Author="CERN DEM JLC", Component Type=Standard, CreateDate=03.12.2007, HelpURL=\\cern.ch\dfs\Applications\Altium\Datasheets\R0603_NIC_NRC.pdf, LatestRevisionDate=13.03.2008, Manufacturer Part Number=R0603_82K_1%_0.1W_100PPM, Mounted=Yes, Part Description="General Purpose Thick Film Chip Resistor", Part Number=R0603_82K_1%_0.1W_100PPM, Pin Count=2, Sense=No, SMD=Yes, Socket=No, Status=Preferred, TC=±100ppm/°C
R14A R14B R14C R14D R14E R14F R14G R14H R16A R16B R16C R16D R16E R16F R16G R16H: library part R0402_51R_1%_0.0625W_100PPM, "Resistor - 1%", Case=0402, Manufacturer=GENERIC, Manufacturer1 ComponentHeight=0.4mm, Manufacturer1 Example="YAGEO PHYCOMP", Manufacturer1 Part Number=232270675109L, Power=0.0625W, Tolerance=±1%, Author="CERN DEM JLC", Component Type=Standard, CreateDate=03.12.2007, HelpURL=\\cern.ch\dfs\Applications\Altium\Datasheets\R0402_Phycomp_RC0402.pdf, LatestRevisionDate=17.10.2012, Manufacturer Part Number=R0402_51R_1%_0.0625W_100PPM, Mounted=Yes, Part Description="General Purpose Thick Film Chip Resistor", Part Number=R0402_51R_1%_0.0625W_100PPM, Pin Count=2, PressFit=No, Sense=No, SMD=Yes, Socket=No, Status="Not Recommended", TC=±100ppm/°C
R18 R38 R143: library part R0603_2K7_1%_0.1W_100PPM, "Resistor - 1%", Case=0603, Manufacturer=GENERIC, Manufacturer1 ComponentHeight=0.55mm, Manufacturer1 Example="YAGEO PHYCOMP", Manufacturer1 Part Number=RC0603FR-072K7L, Power=0.1W, Tolerance=±1%, Author="CERN DEM JLC", Component Type=Standard, CreateDate=02.05.2011, HelpURL=\\cern.ch\dfs\Applications\Altium\Datasheets\R0603_PHYCOMP_RC0603.pdf, LatestRevisionDate=02.05.2011, Manufacturer Part Number=R0603_2K7_1%_0.1W_100PPM, Mounted=Yes, Part Description="General Purpose Thick Film Chip Resistor", Part Number=R0603_2K7_1%_0.1W_100PPM, Pin Count=2, Sense=No, SMD=Yes, Socket=No, Status=Preferred, TC=±100ppm/°C
R19: library part R0603_36K_1%_0.1W_100PPM, "Resistor - 1%", Case=0603, Manufacturer=GENERIC, Manufacturer1 ComponentHeight=0.55mm, Manufacturer1 Example="NIC COMPONENT", Manufacturer1 Part Number=NRC06F3602TRF, Power=0.1W, Tolerance=±1%, Author="CERN DEM JLC", Component Type=Standard, CreateDate=03.12.2007, HelpURL=\\cern.ch\dfs\Applications\Altium\Datasheets\R0603_NIC_NRC.pdf, LatestRevisionDate=13.03.2008, Manufacturer Part Number=R0603_36K_1%_0.1W_100PPM, Mounted=Yes, Part Description="General Purpose Thick Film Chip Resistor", Part Number=R0603_36K_1%_0.1W_100PPM, Pin Count=2, PressFit=No, Sense=No, SMD=Yes, Socket=No, Status=Preferred, TC=±100ppm/°C
R20: library part R0603_270K_1%_0.1W_100PPM, "Resistor - 1%", Case=0603, Manufacturer=GENERIC, Manufacturer1 ComponentHeight=0.55mm, Manufacturer1 Example="NIC COMPONENT", Manufacturer1 Part Number=NRC06F2703TRF, Power=0.1W, Tolerance=±1%, Author="CERN DEM JLC", Component Type=Standard, CreateDate=03.12.2007, HelpURL=\\cern.ch\dfs\Applications\Altium\Datasheets\R0603_NIC_NRC.pdf, LatestRevisionDate=13.03.2008, Manufacturer Part Number=R0603_270K_1%_0.1W_100PPM, Mounted=Yes, Part Description="General Purpose Thick Film Chip Resistor", Part Number=R0603_270K_1%_0.1W_100PPM, Pin Count=2, Sense=No, SMD=Yes, Socket=No, Status=Preferred, TC=±100ppm/°C
R23 R50A R50B R50C R50D R50E R50F R50G R50H: library part R0402_2K4_1%_0.0625W_100PPM, "Resistor - 1%", Case=0402, Manufacturer=GENERIC, Manufacturer1 ComponentHeight=0.4mm, Manufacturer1 Example="YAGEO PHYCOMP", Manufacturer1 Part Number=232270672402L, Power=0.0625W, Tolerance=±1%, Author="CERN DEM JLC", Component Type=Standard, CreateDate=03.12.2007, HelpURL=\\cern.ch\dfs\Applications\Altium\Datasheets\R0402_Phycomp_RC0402.pdf, LatestRevisionDate=17.10.2012, Manufacturer Part Number=R0402_2K4_1%_0.0625W_100PPM, Mounted=Yes, Part Description="General Purpose Thick Film Chip Resistor", Part Number=R0402_2K4_1%_0.0625W_100PPM, Pin Count=2, PressFit=No, Sense=No, SMD=Yes, Socket=No, Status="Not Recommended", TC=±100ppm/°C
R24: library part R0402_33K_1%_0.0625W_100PPM, "Resistor - 1%", Case=0402, Manufacturer=GENERIC, Manufacturer1 ComponentHeight=0.4mm, Manufacturer1 Example="YAGEO PHYCOMP", Manufacturer1 Part Number=232270673303L, Power=0.0625W, Tolerance=±1%, Author="CERN DEM JLC", Component Type=Standard, CreateDate=03.12.2007, HelpURL=\\cern.ch\dfs\Applications\Altium\Datasheets\R0402_Phycomp_RC0402.pdf, LatestRevisionDate=17.10.2012, Manufacturer Part Number=R0402_33K_1%_0.0625W_100PPM, Mounted=Yes, Part Description="General Purpose Thick Film Chip Resistor", Part Number=R0402_33K_1%_0.0625W_100PPM, Pin Count=2, PressFit=No, Sense=No, SMD=Yes, Socket=No, Status="Not Recommended", TC=±100ppm/°C
R25 R48: library part R0402_62K_1%_0.0625W_100PPM, "Resistor - 1%", Case=0402, Manufacturer=GENERIC, Manufacturer1 ComponentHeight=0.4mm, Manufacturer1 Example="YAGEO PHYCOMP", Manufacturer1 Part Number=232270676203L, Power=0.0625W, Tolerance=±1%, Author="CERN DEM JLC", Component Type=Standard, CreateDate=03.12.2007, HelpURL=\\cern.ch\dfs\Applications\Altium\Datasheets\R0402_Phycomp_RC0402.pdf, LatestRevisionDate=17.10.2012, Manufacturer Part Number=R0402_62K_1%_0.0625W_100PPM, Mounted=Yes, Part Description="General Purpose Thick Film Chip Resistor", Part Number=R0402_62K_1%_0.0625W_100PPM, Pin Count=2, PressFit=No, Sense=No, SMD=Yes, Socket=No, Status="Not Recommended", TC=±100ppm/°C
R26 R32 R52 R56 R72 R73A R73B R73C R73D R73E R73F R73G R73H R142: library part R0603_24K_1%_0.1W_100PPM, "Resistor - 1%", Case=0603, Manufacturer=GENERIC, Manufacturer1 ComponentHeight=0.55mm, Manufacturer1 Example="NIC COMPONENT", Manufacturer1 Part Number=NRC06F2402TRF, Power=0.1W, Tolerance=±1%, Author="CERN DEM JLC", Component Type=Standard, CreateDate=03.12.2007, HelpURL=\\cern.ch\dfs\Applications\Altium\Datasheets\R0603_NIC_NRC.pdf, LatestRevisionDate=13.03.2008, Manufacturer Part Number=R0603_24K_1%_0.1W_100PPM, Mounted=Yes, Part Description="General Purpose Thick Film Chip Resistor", Part Number=R0603_24K_1%_0.1W_100PPM, Pin Count=2, Sense=No, SMD=Yes, Socket=No, Status=Preferred, TC=±100ppm/°C
  R72 R73A R73B R73C R73D R73E R73F R73G R73H: PressFit=No
R27 R28 R51 R57: library part R0402_5K1_1%_0.0625W_100PPM, "Resistor - 1%", Case=0402, Manufacturer=GENERIC, Manufacturer1 ComponentHeight=0.4mm, Manufacturer1 Example="YAGEO PHYCOMP", Manufacturer1 Part Number=232270675102L, Power=0.0625W, Tolerance=±1%, Author="CERN DEM JLC", Component Type=Standard, CreateDate=03.12.2007, HelpURL=\\cern.ch\dfs\Applications\Altium\Datasheets\R0402_Phycomp_RC0402.pdf, LatestRevisionDate=17.10.2012, Manufacturer Part Number=R0402_5K1_1%_0.0625W_100PPM, Mounted=Yes, Part Description="General Purpose Thick Film Chip Resistor", Part Number=R0402_5K1_1%_0.0625W_100PPM, Pin Count=2, PressFit=No, Sense=No, SMD=Yes, Socket=No, Status="Not Recommended", TC=±100ppm/°C
R29: library part R0402_20K_1%_0.0625W_100PPM, "Resistor - 1%", Case=0402, Manufacturer=GENERIC, Manufacturer1 ComponentHeight=0.4mm, Manufacturer1 Example="YAGEO PHYCOMP", Manufacturer1 Part Number=232270672003L, Power=0.0625W, Tolerance=±1%, Author="CERN DEM JLC", Component Type=Standard, CreateDate=03.12.2007, HelpURL=\\cern.ch\dfs\Applications\Altium\Datasheets\R0402_Phycomp_RC0402.pdf, LatestRevisionDate=17.10.2012, Manufacturer Part Number=R0402_20K_1%_0.0625W_100PPM, Mounted=Yes, Part Description="General Purpose Thick Film Chip Resistor", Part Number=R0402_20K_1%_0.0625W_100PPM, Pin Count=2, PressFit=No, Sense=No, SMD=Yes, Socket=No, Status="Not Recommended", TC=±100ppm/°C
R33A R33B R33C R33D R33E R33F R33G R33H R41A R41B R41C R41D R41E R41F R41G R41H R75 R76: library part R0603_0R_JUMPER, "Resistor", Case=0603, Manufacturer=GENERIC, Manufacturer1 ComponentHeight=0.55mm, Manufacturer1 Example="NIC COMPONENT", Manufacturer1 Part Number=NRC06Z0, Author="CERN DEM JLC", Component Type=Standard, CreateDate=03.12.2007, HelpURL=\\cern.ch\dfs\Applications\Altium\Datasheets\R0603_NIC_NRC.pdf, LatestRevisionDate=13.03.2008, Manufacturer Part Number=R0603_0R_JUMPER, Mounted=Yes, Part Description="1A (0.05R Max DC Resistance) Zero Ohm Jumper", Part Number=R0603_0R_JUMPER, Pin Count=2, Sense=No, SMD=Yes, Socket=No, Status=Preferred
  R75 R76: PressFit=No
R34A R34B R34C R34D R34E R34F R34G R34H R42A R42B R42C R42D R42E R42F R42G R42H: library part R0603_1K8_1%_0.1W_100PPM, "Resistor - 1%", Case=0603, Manufacturer=GENERIC, Manufacturer1 ComponentHeight=0.55mm, Manufacturer1 Example="NIC COMPONENT", Manufacturer1 Part Number=NRC06F1801TRF, Power=0.1W, Tolerance=±1%, Author="CERN DEM JLC", Component Type=Standard, CreateDate=03.12.2007, HelpURL=\\cern.ch\dfs\Applications\Altium\Datasheets\R0603_NIC_NRC.pdf, LatestRevisionDate=13.03.2008, Manufacturer Part Number=R0603_1K8_1%_0.1W_100PPM, Mounted=Yes, Part Description="General Purpose Thick Film Chip Resistor", Part Number=R0603_1K8_1%_0.1W_100PPM, Pin Count=2, Sense=No, SMD=Yes, Socket=No, Status=Preferred, TC=±100ppm/°C
R35A R35B R35C R35D R35E R35F R35G R35H R43A R43B R43C R43D R43E R43F R43G R43H: library part R0603_100K_1%_0.1W_100PPM, "Resistor - 1%", Case=0603, Manufacturer=GENERIC, Manufacturer1 ComponentHeight=0.55mm, Manufacturer1 Example="NIC COMPONENT", Manufacturer1 Part Number=NRC06F1003TRF, Power=0.1W, Tolerance=±1%, Author="CERN DEM JLC", Component Type=Standard, CreateDate=03.12.2007, HelpURL=\\cern.ch\dfs\Applications\Altium\Datasheets\R0603_NIC_NRC.pdf, LatestRevisionDate=13.03.2008, Manufacturer Part Number=R0603_100K_1%_0.1W_100PPM, Mounted=Yes, Part Description="General Purpose Thick Film Chip Resistor", Part Number=R0603_100K_1%_0.1W_100PPM, Pin Count=2, Sense=No, SMD=Yes, Socket=No, Status=Preferred, TC=±100ppm/°C